# EAGLE board TTR1 Gr4 - SIMON Timothée Pic Simple (EAGLE 7.6.0)
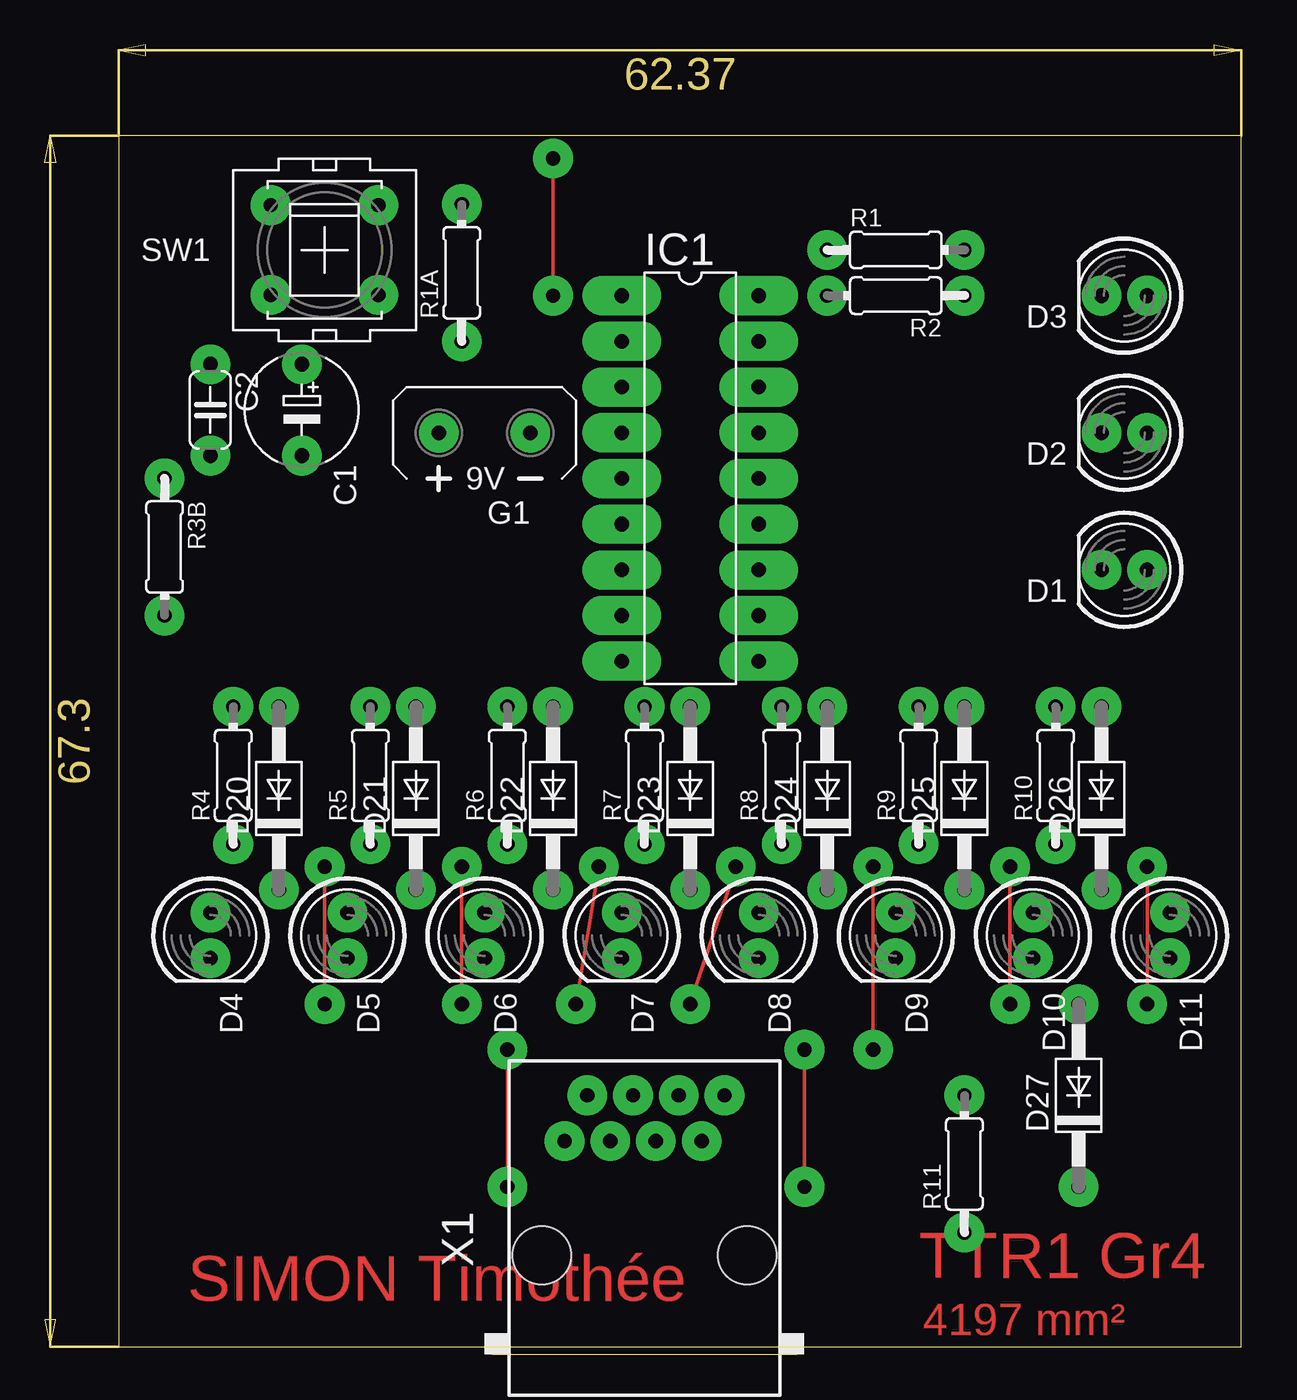
[diagram p0: board, top side]
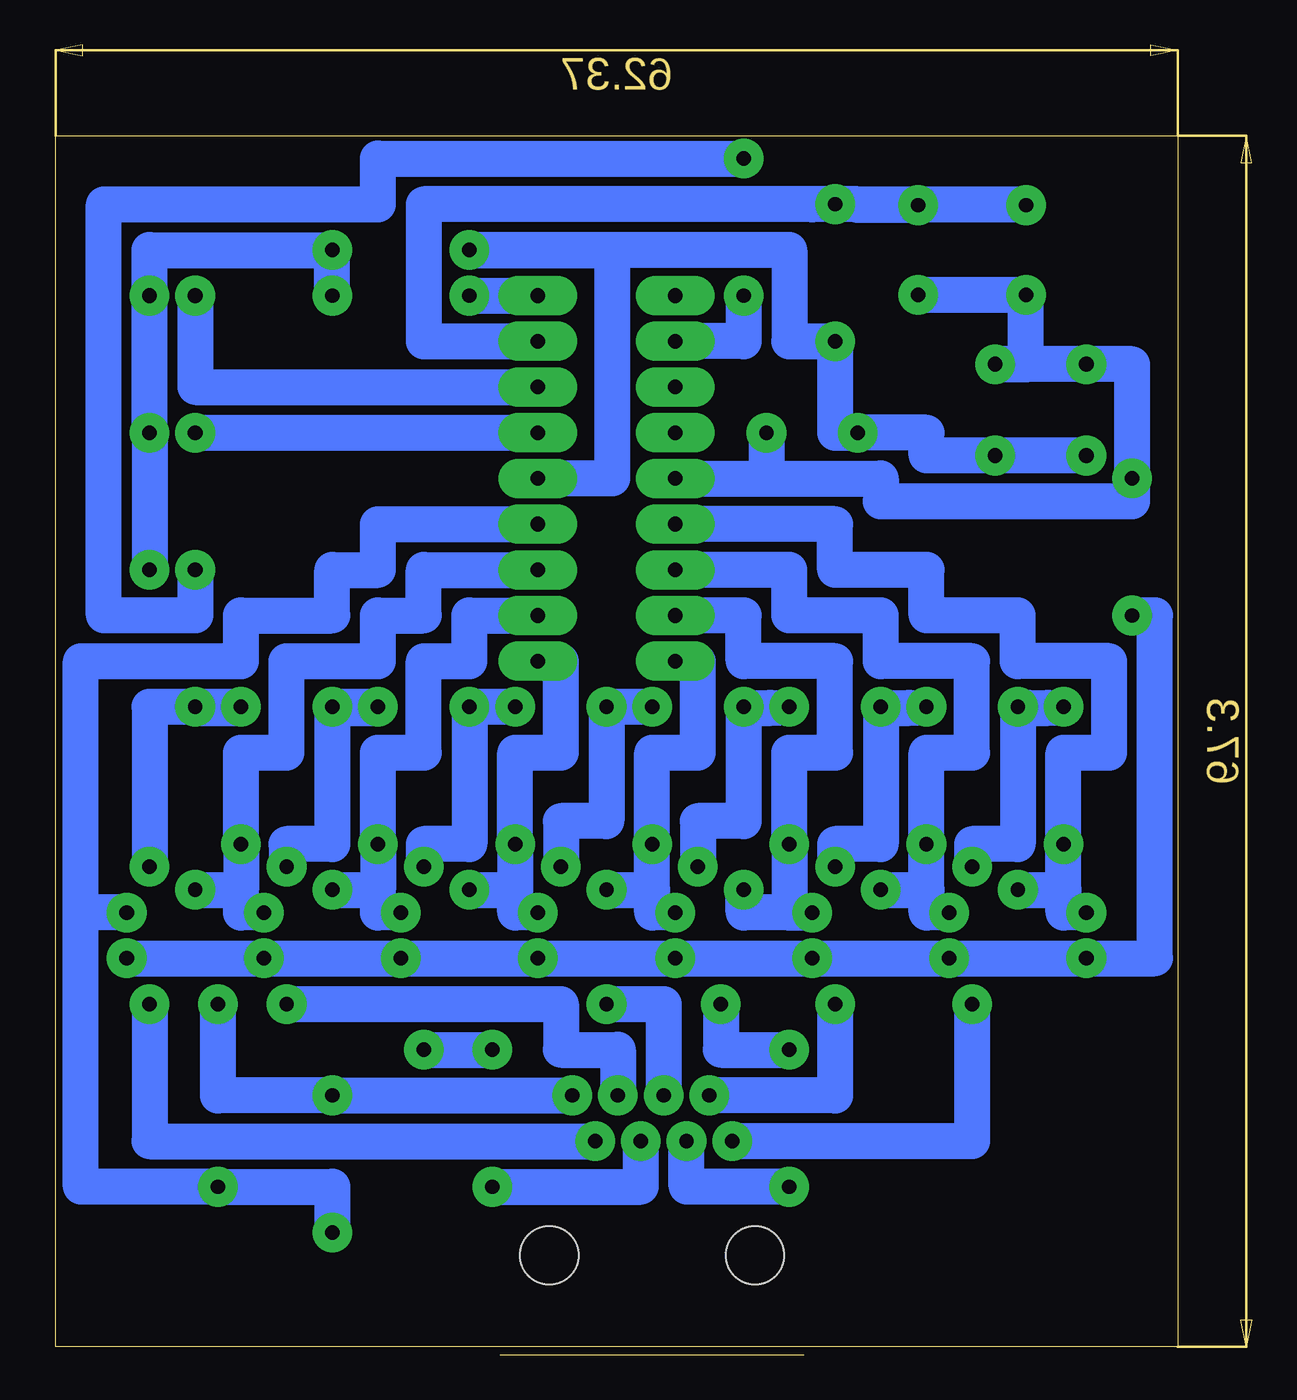
[diagram p1: board, bottom side, seen from below]

Size 62.37 x 67.3 mm. Coordinates in mm from the lower left corner, seen from the top.
Outline: 0,0 62.37,0 62.37,67.3 0,67.3 0,0
Copper layers (1*16): Top 0.035mm / dielectric 1.5mm / Bottom 0.035mm
Design rules "default": minimum track width 10mil, minimum drill 24mil, track to track 8mil, track to pad 8mil, pad to pad 8mil, via to via 8mil, smd to smd 8mil, copper to edge 40mil, drill to drill 8mil, minimum pad ring 10mil, minimum via ring 8mil, stop-mask expansion 4mil, vias tented up to drill 0mil, thermal gap 10mil
Net classes: 0 default: width 2 mm, drill 0.8 mm, clearance 0.2 mm

## Footprints (pad centres in the part's own frame; a part is rotated, then mirrored left to right if it is on the bottom)
E5-6 = drill 0.813 pad 2.2: + -2.54,0; - 2.54,0
C050-024X044 = drill 0.813 pad 2.2: 1 -2.54,0; 2 2.54,0
LED5MM = drill 0.813 pad 2.2: A -1.27,0; K 1.27,0
DO41-10 = drill 0.8 pad 2.2: A 5.08,0; C -5.08,0
AB9V = drill 0.8 pad 2.2: + 0,2.54; - 0,-2.54
DIL18 = drill 0.813 pad 2.2 long: 1 -10.16,-3.81; 2 -7.62,-3.81; 3 -5.08,-3.81; 4 -2.54,-3.81; 5 0,-3.81; 6 2.54,-3.81; 7 5.08,-3.81; 8 7.62,-3.81; 9 10.16,-3.81; 10 10.16,3.81; 11 7.62,3.81; 12 5.08,3.81; 13 2.54,3.81; 14 0,3.81; 15 -2.54,3.81; 16 -5.08,3.81; 17 -7.62,3.81; 18 -10.16,3.81
0204/7 = drill 0.8 pad 2.2: 1 -3.81,0; 2 3.81,0
PVA1R = drill 0.8 pad 2.2: 1 -2.997,2.489; 2 -2.997,-2.489; 3 2.997,2.489; 4 2.997,-2.489
RJ45-NO-SHIELD = drill 0.8 pad 2.2: 1 -4.445,6.35; 2 -3.175,8.89; 3 -1.905,6.35; 4 -0.635,8.89; 5 0.635,6.35; 6 1.905,8.89; 7 3.175,6.35; 8 4.445,8.89 | hole 3.251: -5.715,0; 5.715,0

## Placement (x,y rotation side)
C1  100µ  [E5-6]  10.16,52.07 270 top
C2  100n  [C050-024X044]  5.08,52.07 270 top
D1  [LED5MM]  55.88,43.18 180 top
D2  [LED5MM]  55.88,50.8 180 top
D3  [LED5MM]  55.88,58.42 180 top
D4  [LED5MM]  5.08,22.86 270 top
D5  [LED5MM]  12.7,22.86 270 top
D6  [LED5MM]  20.32,22.86 270 top
D7  [LED5MM]  27.94,22.86 270 top
D8  [LED5MM]  35.56,22.86 270 top
D9  [LED5MM]  43.18,22.86 270 top
D10  [LED5MM]  50.8,22.86 270 top
D11  [LED5MM]  58.42,22.86 270 top
D20  1N4004  [DO41-10]  8.89,30.48 90 top
D21  1N4004  [DO41-10]  16.51,30.48 90 top
D22  1N4004  [DO41-10]  24.13,30.48 90 top
D23  1N4004  [DO41-10]  31.75,30.48 90 top
D24  1N4004  [DO41-10]  39.37,30.48 90 top
D25  1N4004  [DO41-10]  46.99,30.48 90 top
D26  1N4004  [DO41-10]  54.61,30.48 90 top
D27  1N4004  [DO41-10]  53.34,13.97 90 top
G1  AB9V  [AB9V]  20.32,50.8 90 top
IC1  PIC16F627P  [DIL18]  31.75,48.26 270 top
R1  720  [0204/7]  43.18,60.96 0 top
R1A  720  [0204/7]  19.05,59.69 90 top
R2  10K  [0204/7]  43.18,58.42 180 top
R3B  720  [0204/7]  2.54,44.45 270 top
R4  [0204/7]  6.35,31.75 90 top
R5  [0204/7]  13.97,31.75 90 top
R6  [0204/7]  21.59,31.75 90 top
R7  [0204/7]  29.21,31.75 90 top
R8  [0204/7]  36.83,31.75 90 top
R9  [0204/7]  44.45,31.75 90 top
R10  [0204/7]  52.07,31.75 90 top
R11  [0204/7]  46.99,10.16 90 top
SW1  PVA1R  [PVA1R]  11.43,60.96 180 top
X1  RJ45-6L-B  [RJ45-NO-SHIELD]  29.21,5.08 0 top

## Library data of the parts
C1 C2 R1 R1A R2 R3B R4-R11 = resistor
D1-D11 = led
D20-D27 = diode
G1 = battery
IC1 = microchip; MF: MICROCHIP; MPN: PIC16F627-20I/P; OC_FARNELL: 1084298; OC_NEWARK: 23C4967
SW1 = switch-misc
X1 = con-tycoelectronics; MPN: RJ45-6L-B; OC_FARNELL: unknown; OC_NEWARK: 16R6090

## Nets
D20: D4.A D20.C IC1.6 R4.1
GND: C1.+ C2.1 G1.- IC1.5 R3B.1 SW1.1 SW1.3
N$1: D5.A D21.C IC1.7 R5.1
N$2: D2.K IC1.15
N$3: IC1.18 R2.2
N$4: D7.A D23.C IC1.9 R7.1
N$5: IC1.17 R1A.2 SW1.2 SW1.4
N$6: D1.A D2.A D3.A R1.2 R2.1
N$7: D21.A R5.2 X1.2
N$8: D1.K IC1.2
N$9: D9.A D25.C IC1.11 R9.1
N$11: D3.K IC1.16
N$12: D6.A D22.C IC1.8 R6.1
N$13: D23.A R7.2 X1.4
N$14: D20.A R4.2 X1.1
N$15: D8.A D24.C IC1.10 R8.1
N$16: D25.A R9.2 X1.6
N$17: D26.A R10.2 X1.7
N$18: D4.K D5.K D6.K D7.K D8.K D9.K D10.K D11.K R3B.2
N$19: D24.A R8.2 X1.5
N$21: D27.A R11.2 X1.8
N$23: C1.- C2.2 G1.+ IC1.14 R1.1 R1A.1
N$25: D10.A D26.C IC1.12 R10.1
N$27: D22.A R6.2 X1.3
N$29: D11.A D27.C IC1.13 R11.1

## Tracks (layer width: path | path; a pad name or v marks a point on that pad's centre or on a via)
D20
  Bottom 2: D4.A 6.35,24.13 6.35,25.4 | D20.C 6.35,25.4 | 6.35,25.4 R4.1 6.35,33.02 3.81,33.02 3.81,38.1 8.89,38.1 8.89,40.64 13.97,40.64 13.97,43.18 19.05,43.18 19.05,45.72 IC1.6
GND
  Bottom 2: IC1.5 22.86,48.26 | G1.- 22.86,48.26 | 22.86,48.26 16.51,48.26 16.51,46.99 2.54,46.99 R3B.1 2.54,54.61 C2.1 C1.+ 8.43,54.61 SW1.3 SW1.1
N$1
  Bottom 2: D5.A 13.97,24.13 13.97,25.4 | 13.97,25.4 R5.1 13.97,33.02 11.43,33.02 11.43,38.1 16.51,38.1 16.51,40.64 21.59,40.64 21.59,43.18 IC1.7 | D21.C 13.97,25.4
N$2
  Bottom 2: D2.K IC1.15
N$3
  Bottom 2: R2.2 IC1.18
N$4
  Bottom 2: D7.A 29.21,24.13 29.21,25.4 | 29.21,25.4 R7.1 29.21,33.02 26.67,33.02 26.67,38.1 IC1.9 | D23.C 29.21,25.4
N$5
  Bottom 2: IC1.17 41.91,55.88 41.91,63.5 R1A.2 | 17.78,63.5 R1A.2 | 17.78,63.5 8.43,63.5 SW1.4 | SW1.2 17.78,63.45 17.78,63.5 | R1A.2 20.32,63.5
N$6
  Bottom 2: R2.1 R1.2 57.15,60.96 D3.A D2.A D1.A
N$7  (via drill 0.8 pad 2.2)
  Top 0.2: v19.05,26.67 v19.05,19.05
  Bottom 2: R5.2 14.93,35.51 16.03,35.51 D21.A 16.51,27.94 19.05,27.94 v19.05,26.67 | X1.2 19.05,13.97 v19.05,19.05
N$8  (via drill 0.8 pad 2.2)
  Top 0.2: v24.13,66.04 v24.13,58.42
  Bottom 2: D1.K 54.61,40.64 59.69,40.64 59.69,63.5 44.45,63.5 44.45,66.04 v24.13,66.04 | v24.13,58.42 24.13,55.88 IC1.2
N$9
  Bottom 2: D9.A 44.45,24.13 44.45,25.4 | D25.C 44.45,25.4 | 44.45,25.4 R9.1 44.45,33.02 41.91,33.02 41.91,38.1 39.37,38.1 39.37,40.64 IC1.11
N$11
  Bottom 2: D3.K 54.61,53.34 IC1.16
N$12
  Bottom 2: 21.59,24.13 R6.1 21.59,33.02 19.05,33.02 19.05,38.1 24.13,38.1 24.13,40.64 IC1.8 | 21.59,24.13 D6.A | 21.59,24.13 24.13,24.13 D22.C
N$13  (via drill 0.8 pad 2.2)
  Top 0.2: v34.29,26.67 v31.75,19.05
  Bottom 2: R7.2 D23.A 31.75,29.21 34.29,29.21 v34.29,26.67 | X1.4 28.58,19.05 v31.75,19.05
N$14  (via drill 0.8 pad 2.2)
  Top 0.2: v11.43,26.67 v11.43,19.05
  Bottom 2: R4.2 7.22,35.51 8.32,35.51 D20.A 8.89,27.94 11.43,27.94 v11.43,26.67 | X1.1 11.43,11.43 v11.43,19.05
N$15
  Bottom 2: D8.A 36.83,24.13 36.83,25.4 | D24.C 36.83,25.4 | 36.83,25.4 R8.1 36.83,33.02 34.29,33.02 34.29,38.1 IC1.10
N$16  (via drill 0.8 pad 2.2)
  Top 0.2: v49.53,26.67 v49.53,19.05
  Bottom 2: D25.A 46.88,35.51 44.67,35.51 R9.2 D25.A | v49.53,19.05 34.29,19.05 34.29,16.51 31.12,16.51 X1.6 | D25.A 46.99,27.94 49.53,27.94 v49.53,26.67
N$17  (via drill 0.8 pad 2.2)
  Top 0.2: v57.15,26.67 v57.15,19.05
  Bottom 2: D26.A 54.59,35.51 52.39,35.51 R10.2 D26.A | v57.15,19.05 57.15,11.43 X1.7 | D26.A 57.15,35.56 v57.15,26.67
N$18
  Bottom 2: R3B.2 1.27,40.64 1.27,21.59 D4.K D5.K D6.K D7.K D8.K D9.K D10.K D11.K
N$19  (via drill 0.8 pad 2.2)
  Top 0.2: v41.91,26.67 v41.91,16.51 | v38.1,16.51 v38.1,8.89
  Bottom 2: R8.2 D24.A 39.37,27.94 41.91,27.94 v41.91,26.67 | v41.91,16.51 v38.1,16.51 | v38.1,8.89 29.84,8.89 X1.5
N$21
  Bottom 2: X1.8 R11.2 53.34,13.97 D27.A
N$23
  Bottom 2: IC1.14 31.43,48.26 31.43,60.96 R1.1 21.59,60.96 21.59,55.88 R1A.1 19.05,50.8 G1.+ 13.97,50.8 13.97,49.53 C1.- C2.2
N$25
  Bottom 2: D10.A 52.07,24.13 52.07,25.4 | D26.C 52.07,25.4 | 52.07,25.4 R10.1 52.07,33.02 49.53,33.02 49.53,38.1 44.45,38.1 44.45,40.64 41.91,40.64 41.91,43.18 IC1.12
N$27  (via drill 0.8 pad 2.2)
  Top 0.2: v26.67,26.67 v25.4,19.05 | v21.59,16.51 v21.59,8.89
  Bottom 2: 23.74,35.51 22.64,35.51 R6.2 | 23.74,35.51 D22.A | 23.74,35.51 24.13,35.51 24.13,29.21 26.67,29.21 v26.67,26.67 | v21.59,8.89 27.3,8.89 X1.3 | v25.4,19.05 25.4,16.51 v21.59,16.51
N$29
  Bottom 2: IC1.13 44.45,45.72 44.45,43.18 46.99,43.18 46.99,40.64 52.07,40.64 52.07,38.1 60.96,38.1 60.96,24.13 | D11.A 60.96,24.13 | 60.96,24.13 60.96,8.89 D27.C 46.99,8.89 R11.1

## Text on the board
Top: TTR1 Gr4 | SIMON Timothée | 4197 mm²